# Altium PCB DevBOB.PcbDoc
Units mil, origin at the board's own origin, x right, y up, seen from the top; angles counter-clockwise.
Board outline 500 x 700 mil, 2 copper layers (Top Layer, Bottom Layer), stack 61.756 mil thick; 3 components, 5 nets, 17 pads, 0 vias.
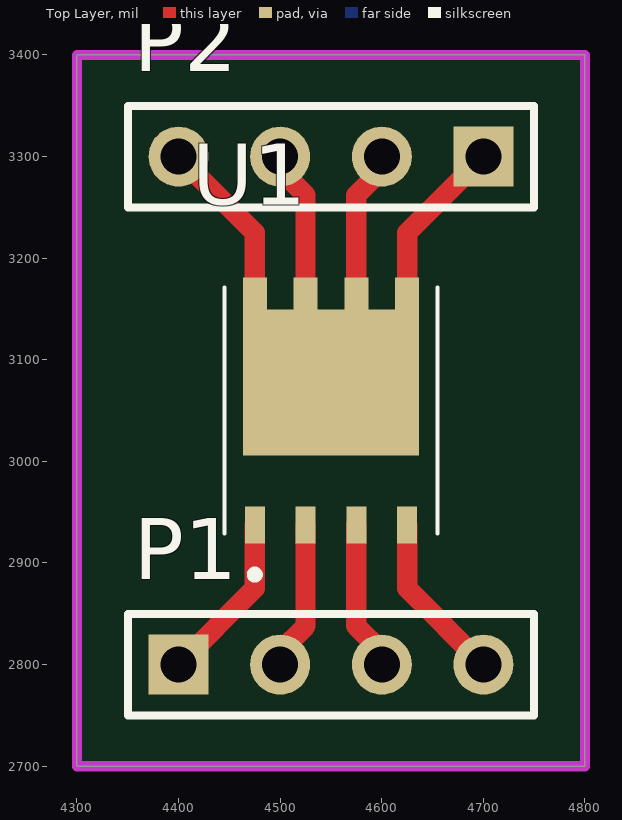
[diagram p0: Top Layer view]
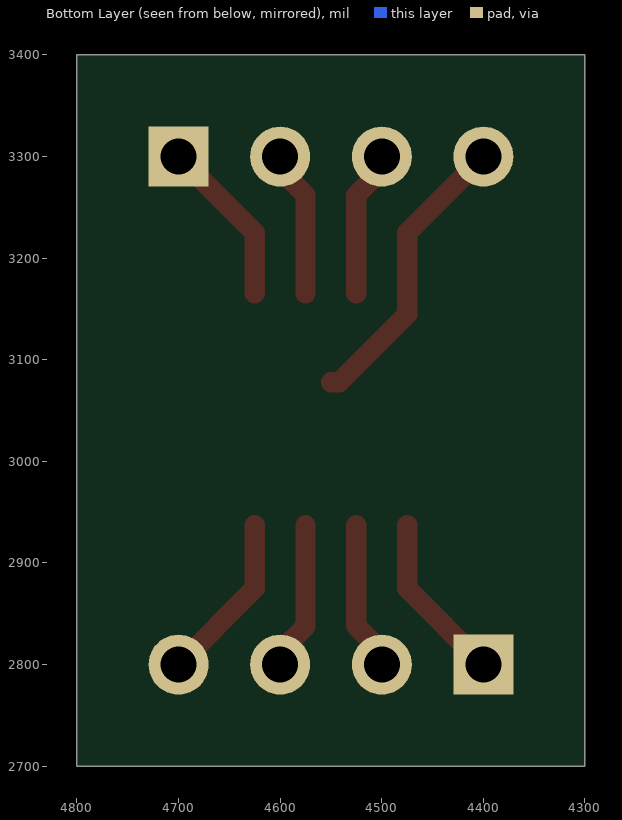
[diagram p1: Bottom Layer view, seen from below]

## Layer stack, top to bottom
Top Solder: solder mask 1, SM-001, Dk 4
Top Layer: signal copper 1.378
Dielectric 1: core 59, Core-043, Dk 4.3
Bottom Layer: signal copper 1.378
Bottom Solder: solder mask 1, SM-001, Dk 4

## Board outline
4300,2700 4800,2700 4800,3400 4300,3400

## Design rules (kind name [scope] priority, off if disabled: settings)
Clearance [All] p1: gap=10 ignorepadtopadclearanceinfootprint=FALSE except(0: Arc-Hole Track-Hole SMDPad-Hole THPad-Hole Via-Hole Fill-Hole Poly-Hole Region-Hole Text-Hole)
PolygonConnect [All] p1: connectstyle=Relief reliefconductorwidth=10 reliefentries=4 polygonreliefangle="90 Angle" airgapwidth=10
RoutingVias [All] p1: holewidth=28 width=50 viastyle="Through Hole" minholewidth=28 minwidth=50 maxholewidth=28 maxwidth=50
SolderMaskExpansion [All] p1: expansion=4 istentingtop=FALSE
Width [All] p1: maxlimit=10 minlimit=10 preferedwidth=10
30 further rules are at their usual default settings.

## Components (designator, comment, footprint, x,y, rotation, side; value= is the part's Value field where it differs from the comment)
P1 "Header 4" HDR1X4 4400,2800 r0 top
P2 "Header 4" HDR1X4 4700,3300 r180 top
U1 "BSC0802LS" TDSON-8 4550,3050 r0 top

## Footprints (in the part's own frame and the unit in brackets; to place one, negate y for a bottom-side part, rotate by r counter-clockwise, add the part's x,y. Pads: shape width x height; smd on the part's side, far side on the other; paste and mask are expansions set on the pad)
HDR1X4 [mm] "Connector; Header; 4 Position"
  rect 1.5x1.5 hole 0.9: 1(0,0)
  round 1.5 hole 0.9: 2(2.54,0) 3(5.08,0) 4(7.62,0)
  silkscreen extent -1.27,-1.27 8.89,1.27
TDSON-8 [mm]
  rect 0.5x0.925 smd: 1(-1.905,-2.865) 2(-0.635,-2.865) 3(0.635,-2.865) 4(1.905,-2.865)
  rect 0.6x0.8 smd: 5(1.905,2.925) 6(0.635,2.925) 7(-0.635,2.925) 8(-1.905,2.925)
  rect 4.41x3.655 smd: 9(0,0.705)
  silkscreen extent -2.66,-4.2 2.66,3.08, body extent -2.66,-3.28 2.66,3.26, height 1.2

## Part data
P1 P2: "Header, 4-Pin", LatestRevisionDate=17-Jul-2002, LatestRevisionNote="Re-released for DXP Platform.", Publisher="Altium Limited"

## Nets (pads, with @x,y where several pads share a name; then routed paths per layer and width w, separated by ;. In a path a pad name is that pad's centre, name@x,y a point inside that pad or via, vN(x,y) a via of type N, cw(c..) or ccw(c..) an arc to the next point about the centre after c; other vN are vias at no path point)
NetP1_1: P1.1 U1.1 | length 168.3
  Top Layer w20: P1.1 4475,2875 U1.1
NetP1_2: P1.2 U1.2 | length 147.6
  Top Layer w20: P1.2 4500,2812.97 4525,2837.97 U1.2
NetP1_3: P1.3 U1.3 | length 147.6
  Top Layer w20: U1.3 4575,2837.97 4600,2812.97 P1.3
NetP1_4: P1.4 U1.4 | length 168.3
  Top Layer w20: U1.4 4625,2875 P1.4
NetP2_1: P2.1 P2.2 P2.3 P2.4 U1.5 U1.6 U1.7 U1.8 U1.9 | length 745.4
  Top Layer w20: P2.4 4475,3225 U1.8 4475,3144.7 4541.95,3077.76 U1.9 ; P2.3 4500,3287.03 4525,3262.03 U1.7 ; U1.6 4575,3262.03 4600,3287.03 P2.2 ; U1.5 4625,3225 P2.1

## Keep-outs
Top Layer:
  lines w10: 4300,2700 4300,3400 4525,3400 4575,3400 4800,3400 4800,2700 4300,2700

## Silkscreen, mask and mechanical layers (free items; w line width, h text height)
Board:
  the board outline again, w10